# Altium PCB polygon.PcbDoc
Units mm, origin at the board's own origin, x right, y up, seen from the top; angles counter-clockwise.
Board outline 149.16 x 98.2 mm, 2 copper layers (Top Layer, Bottom Layer); 46 components, 102 nets, 353 pads, 142 vias.
Unrouted connection lines stored in the file: 49.
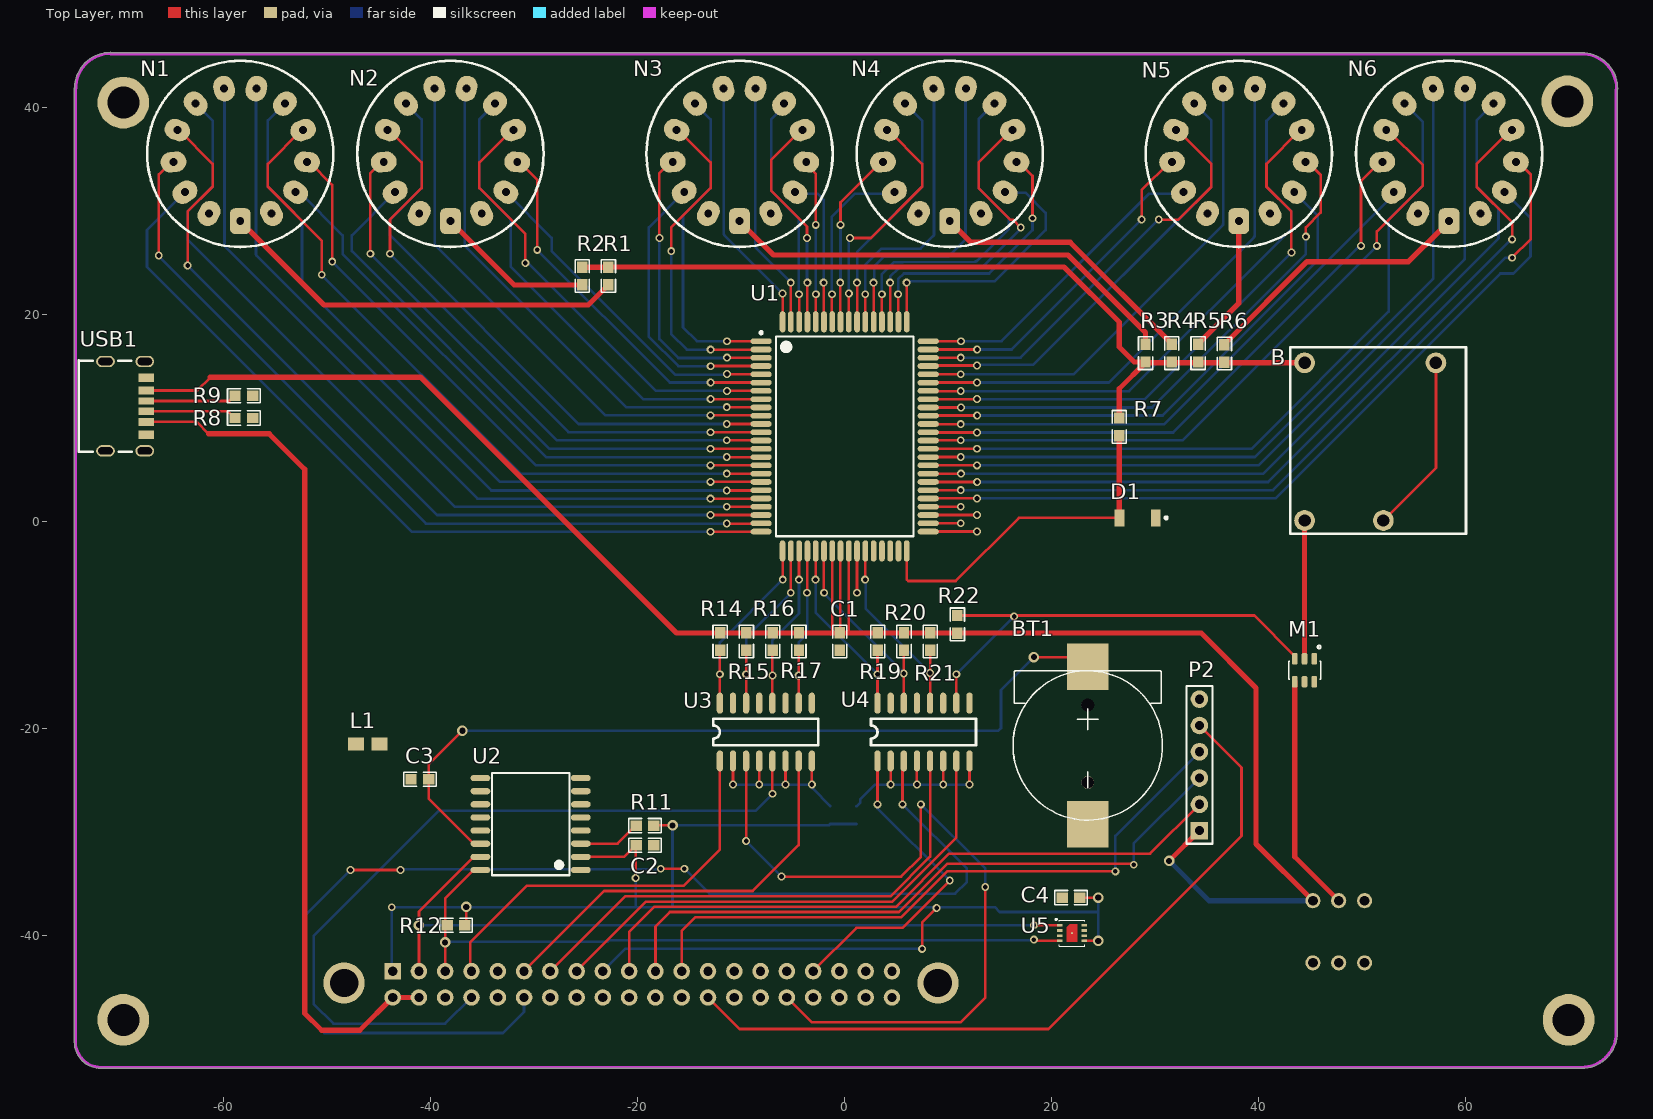
[diagram p0: Top Layer view]
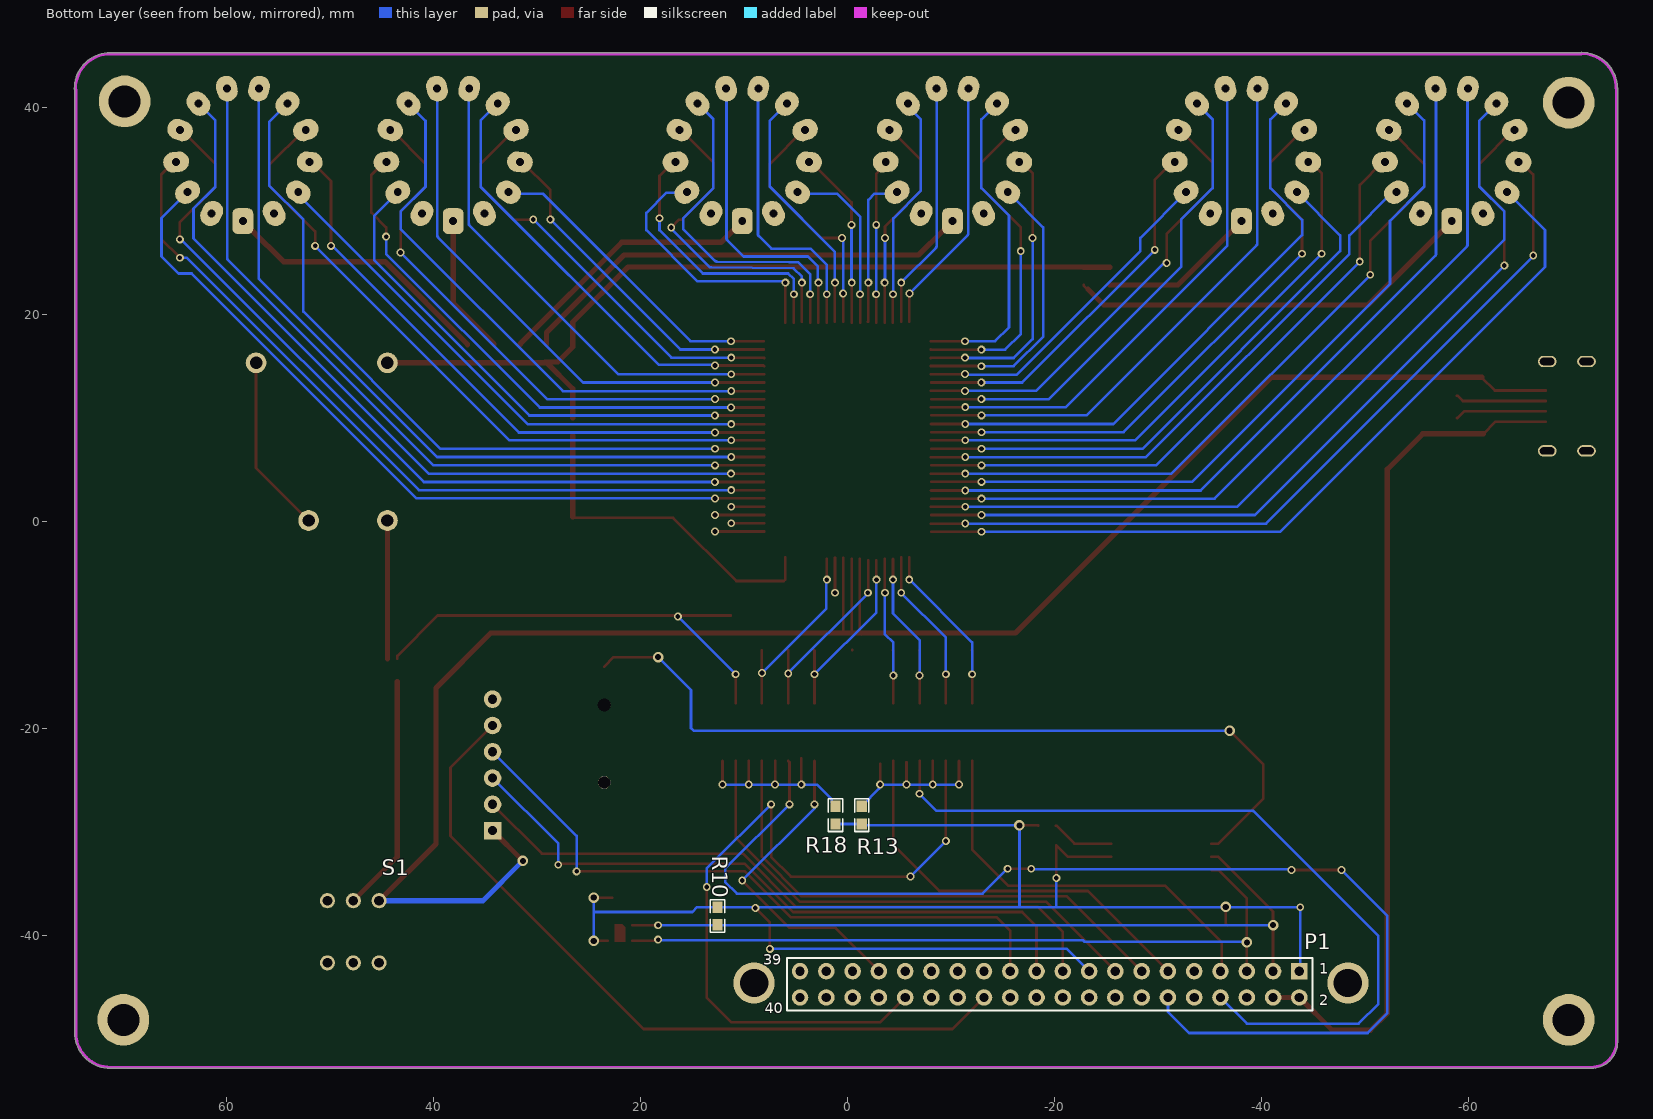
[diagram p1: Bottom Layer view, seen from below]

## Layer stack, top to bottom
Top Solder: solder mask 0.0102, Solder Resist, Dk 3.5
Top Layer: signal copper 0.0356
Dielectric 1: dielectric 0.32, FR-4, Dk 4.8
Bottom Layer: signal copper 0.0356
Bottom Solder: solder mask 0.0102, Solder Resist, Dk 3.5

## Board outline
-74.449,-50.294 ccw(c-71.895,-50.278) -71.908,-52.832 ccw(c-71.907,-52.705) -71.907,-52.832 71.12,-52.832 ccw(c71.12,-52.705) 71.184,-52.815 ccw(c71.248,-52.705) 71.249,-52.832 ccw(c71.222,-49.372) 74.682,-49.372 ccw(c71.222,-49.372) 74.679,-49.219 ccw(c74.551,-49.225) 74.676,-49.2 74.676,41.783 ccw(c74.549,41.783) 74.676,41.795 ccw(c74.58,41.879) 74.707,41.879 ccw(c71.247,41.879) 71.247,45.339 ccw(c71.247,45.212) 71.183,45.322 ccw(c71.12,45.212) 71.12,45.339 -70.911,45.339 ccw(c-70.995,45.243) -70.996,45.37 ccw(c-70.962,41.91) -74.422,41.962 ccw(c-74.322,41.883) -74.449,41.883 -74.449,-50.293 ccw(c-74.322,-50.293)

## Design rules (kind name [scope] priority, off if disabled: settings)
Clearance Clearance_2 [All] p1: gap=0.241 ignorepadtopadclearanceinfootprint=FALSE
Clearance Clearance_1 [All] p2: gap=0.254 ignorepadtopadclearanceinfootprint=FALSE except(0: Arc-Hole Track-Hole SMDPad-Hole THPad-Hole Via-Hole Fill-Hole Poly-Hole Region-Hole Text-Hole)
Clearance [All] p3: gap=0.254 ignorepadtopadclearanceinfootprint=FALSE except(0: Arc-Hole Track-Hole SMDPad-Hole THPad-Hole Via-Hole Fill-Hole Poly-Hole Region-Hole Text-Hole)
PolygonConnect [All] p1: connectstyle=Relief reliefconductorwidth=0.254 reliefentries=4 polygonreliefangle="90 Angle" airgapwidth=0.254
RoutingVias [All] p1: holewidth=0.711 width=1.27 viastyle="Through Hole" minholewidth=0.254 minwidth=0.508 maxholewidth=0.711 maxwidth=1.27
SolderMaskExpansion [All] p1: expansion=0.102 istentingtop=FALSE
Width [All] p1: maxlimit=0.508 minlimit=0.025 preferedwidth=0.254 minimp=50.000000 maximp=50.000000 favimp=50.000000
30 further rules are at their usual default settings.

## Components (designator, comment, footprint, x,y, rotation, side; value= is the part's Value field where it differs from the comment)
B "NCH8200HV" NCH8200HV 44.45,0.127 r90 top
BT1 "CR1220 holder" BAT1220 23.495,-21.59 r180 top
C1 "Cap" C0603 -0.508,-11.557 r90 top value=100pF
C2 "Cap Semi" C0603 -19.304,-31.242 r0 top value=104
C3 "Cap Semi" C0603 -41.06,-24.867 r0 top value=104
C4 "Cap" C0603 21.883,-36.297 r0 top value=100nF
D1 "ZM75" LL-34 28.321,0.381 r180 top
L1 "L0" 0805 -44.958,-21.463 r180 top
M1 "PMOS-AO6401A" SOT95P250X110-6N 44.45,-14.351 r270 top
N1 "ИН-14" IN14 -58.42,35.56 r0 top
N2 "ИН-14" IN14 -38.1,35.56 r0 top
N3 "ИН-14" IN14 -10.16,35.56 r0 top
N4 "ИН-14" IN14 10.16,35.56 r0 top
N5 "ИН-14" IN14 38.1,35.56 r0 top
N6 "ИН-14" IN14 58.42,35.56 r0 top
P1 "Rasp GPIO" HDR2.54-LI-2x20P -19.558,-44.704 r0 bottom
P2 "Header 6" HDR2.54-LI-6P 34.29,-23.495 r90 top
R1 "Res Semi" R0603 -22.86,23.749 r90 top value=20K
R2 "Res Semi" R0603 -25.4,23.749 r90 top value=20K
R3 "Res Semi" R0603 29.108,16.295 r270 top value=20K
R4 "Res Semi" R0603 31.648,16.295 r270 top value=20K
R5 "Res Semi" R0603 34.188,16.295 r270 top value=20K
R6 "Res Semi" R0603 36.728,16.256 r270 top value=20K
R7 "Res Semi" R0603 26.518,9.183 r90 top value=240K
R8 "Res Semi" R0603 -58.078,10.058 r0 top value=5.1K
R9 "Res Semi" R0603 -58.078,12.217 r0 top value=5.1K
R10 "Res Semi" R0603 12.573,-38.1 r90 bottom value=4.7K
R11 "Res Semi" R0603 -19.304,-29.337 r0 top value=10K
R12 "Res Semi" R0603 -37.553,-38.964 r0 top value=4.7K
R13 "Res Semi" R0603 -1.422,-28.36 r270 bottom value=150
R14 "Res Semi" R0603 -12.065,-11.557 r90 top value=1.9K
R15 "Res Semi" R0603 -9.525,-11.557 r90 top value=1.9K
R16 "Res Semi" R0603 -6.985,-11.557 r90 top value=1.9K
R17 "Res Semi" R0603 -4.445,-11.557 r90 top value=1.9K
R18 "Res Semi" R0603 1.118,-28.36 r270 bottom value=150
R19 "Res Semi" R0603 3.175,-11.557 r90 top value=1.9K
R20 "Res Semi" R0603 5.715,-11.557 r90 top value=1.9K
R21 "Res Semi" R0603 8.255,-11.557 r90 top value=1.9K
R22 "Res Semi" R0603 10.922,-9.906 r270 top value=1.9K
S1 "XKB8080-Z" SW_PVA2EEH21.7NV2 47.752,-39.624 r180 bottom
U1 "HV57708" HV57708PG 0,8.255 r0 top
U2 "DS3231" SOP16_75MM -30.353,-29.21 r180 top
U3 "TLP290-4" SO16 -7.62,-20.32 r90 top
U4 "TLP290-4" SO16 7.62,-20.32 r90 top
U5 "SHT31" SHT3x-x-P 21.971,-39.751 r0 top
USB1 "USB3-TypeC-6p" USB-TYPE-C-SMD6 -69.469,11.176 r0 top

## Footprints (in the part's own frame and the unit in brackets; to place one, negate y for a bottom-side part, rotate by r counter-clockwise, add the part's x,y. Pads: shape width x height; smd on the part's side, far side on the other; paste and mask are expansions set on the pad)
0805 [mil] "1/8W"
  rect 60x50 smd: 1(0,0) 2(90,0)
BAT1220 [mm]
  round 1.2 hole 1.2 unplated: 0(0,3.607)
  round 1.2 hole 1.3 unplated: 0(0,-3.886)
  rect 4x4.5 smd: 1(0,-7.595) 2(0,7.645)
  silkscreen extent -7.22,-7.19 7.22,7.24
C0603 [mm] "Chip Resistor; Body 1.6 x 0.8 mm (LxW typ)"
  rect 1.1x1 smd: 1(-0.85,-0.025) 2(0.85,-0.025)
  silkscreen extent -1.57,-0.71 1.57,0.66
HDR2.54-LI-2x20P [mm] "双排排针，20x2脚"
  rect 1.6x1.6 hole 0.9: 1(-24.13,-1.27)
  round 1.6 hole 0.9: 2(-24.13,1.27) 3(-21.59,-1.27) 4(-21.59,1.27) 5(-19.05,-1.27) 6(-19.05,1.27) 7(-16.51,-1.27) 8(-16.51,1.27) 9(-13.97,-1.27) 10(-13.97,1.27) 11(-11.43,-1.27) 12(-11.43,1.27) 13(-8.89,-1.27) 14(-8.89,1.27) 15(-6.35,-1.27) 16(-6.35,1.27) 17(-3.81,-1.27) 18(-3.81,1.27) 19(-1.27,-1.27) 20(-1.27,1.27) 21(1.27,-1.27) 22(1.27,1.27) 23(3.81,-1.27) 24(3.81,1.27) 25(6.35,-1.27) 26(6.35,1.27) 27(8.89,-1.27) 28(8.89,1.27) 29(11.43,-1.27) 30(11.43,1.27) 31(13.97,-1.27) 32(13.97,1.27) 33(16.51,-1.27) 34(16.51,1.27) 35(19.05,-1.27) 36(19.05,1.27) 37(21.59,-1.27) 38(21.59,1.27) 39(24.13,-1.27) 40(24.13,1.27)
  silkscreen extent -25.4,-2.54 25.4,2.54, body extent -25.4,-2.54 25.4,2.54, height 8.5
HDR2.54-LI-6P [mm] "排针，6脚"
  rect 1.7x1.7 hole 0.9: 1(-6.35,0)
  round 1.7 hole 0.9: 2(-3.81,0) 3(-1.27,0) 4(1.27,0) 5(3.81,0) 6(6.35,0)
  silkscreen extent -7.62,-1.27 7.62,1.27, body extent -7.62,-1.27 7.62,1.27, height 2.54
HV57708PG [mm] "QFP, 80-Leads, Body 17.40x23.40mm, Pitch 0.80mm, IPC Medium Density"
  oval 2.05x0.55 smd: 1(-8.075,9.2) 2(-8.075,8.4) 3(-8.075,7.6) 4(-8.075,6.8) 5(-8.075,6) 6(-8.075,5.2) 7(-8.075,4.4) 8(-8.075,3.6) 9(-8.075,2.8) 10(-8.075,2) 11(-8.075,1.2) 12(-8.075,0.4) 13(-8.075,-0.4) 14(-8.075,-1.2) 15(-8.075,-2) 16(-8.075,-2.8) 17(-8.075,-3.6) 18(-8.075,-4.4) 19(-8.075,-5.2) 20(-8.075,-6) 21(-8.075,-6.8) 22(-8.075,-7.6) 23(-8.075,-8.4) 24(-8.075,-9.2) 41(8.075,-9.2) 42(8.075,-8.4) 43(8.075,-7.6) 44(8.075,-6.8) 45(8.075,-6) 46(8.075,-5.2) 47(8.075,-4.4) 48(8.075,-3.6) 49(8.075,-2.8) 50(8.075,-2) 51(8.075,-1.2) 52(8.075,-0.4) 53(8.075,0.4) 54(8.075,1.2) 55(8.075,2) 56(8.075,2.8) 57(8.075,3.6) 58(8.075,4.4) 59(8.075,5.2) 60(8.075,6) 61(8.075,6.8) 62(8.075,7.6) 63(8.075,8.4) 64(8.075,9.2)
  oval 0.55x2.05 smd: 25(-6,-11.075) 26(-5.2,-11.075) 27(-4.4,-11.075) 28(-3.6,-11.075) 29(-2.8,-11.075) 30(-2,-11.075) 31(-1.2,-11.075) 32(-0.4,-11.075) 33(0.4,-11.075) 34(1.2,-11.075) 35(2,-11.075) 36(2.8,-11.075) 37(3.6,-11.075) 38(4.4,-11.075) 39(5.2,-11.075) 40(6,-11.075) 65(6,11.075) 66(5.2,11.075) 67(4.4,11.075) 68(3.6,11.075) 69(2.8,11.075) 70(2,11.075) 71(1.2,11.075) 72(0.4,11.075) 73(-0.4,11.075) 74(-1.2,11.075) 75(-2,11.075) 76(-2.8,11.075) 77(-3.6,11.075) 78(-4.4,11.075) 79(-5.2,11.075) 80(-6,11.075)
  silkscreen extent -8.2,-9.65 6.65,10.15
IN14 [mm]
  rrect50% 2x2.5 hole 0.762: 1(0,-6.5)
  oval 2x2.5 hole 0.762 rot 152.31: 2(-3.021,-5.755)
  oval 2x2.5 hole 0.762 rot 124.62: 3(-5.349,-3.692)
  oval 2x2.5 hole 0.762 rot 96.92: 4(-6.453,-0.784)
  oval 2x2.5 hole 0.762 rot 69.23: 5(-6.078,2.305)
  oval 2x2.5 hole 0.762 rot 41.54: 6(-4.31,4.865)
  oval 2x2.5 hole 0.762 rot 13.85: 7(-1.556,6.311)
  oval 2x2.5 hole 0.762 rot 166.15: 8(1.555,6.311)
  oval 2x2.5 hole 0.762 rot 138.46: 9(4.31,4.866)
  oval 2x2.5 hole 0.762 rot 110.77: 10(6.077,2.305)
  oval 2x2.5 hole 0.762 rot 83.08: 11(6.453,-0.784)
  oval 2x2.5 hole 0.762 rot 55.38: 12(5.349,-3.692)
  oval 2x2.5 hole 0.762 rot 27.69: 13(3.021,-5.755)
  silkscreen extent -9,-9 9,9
LL-34 [mm]
  rect 0.95x1.65 smd: 1(-1.75,0) 2(1.75,0)
  silkscreen extent -2.88,-0.12 -2.63,0.12
NCH8200HV [mm]
  round 2 hole 1.2: 1(0,0) 2(0,-7.62) 3(15.24,-12.7) 4(15.24,0)
  silkscreen extent -1.27,-15.6 16.73,1.4
R0603 [mm] "Chip Resistor; Body 1.6 x 0.8 mm (LxW typ)"
  rect 1.1x1 smd: 1(-0.85,-0.025) 2(0.85,-0.025)
  silkscreen extent -1.57,-0.71 1.57,0.66
SHT3x-x-P [mm] "SHT3x with Plastic"
  rrect50% 0.55x0.25 smd mask+0.05: 1(-1.175,0.75)
  rrect20% 0.55x0.25 smd mask+0.05: 2(-1.175,0.25) 3(-1.175,-0.25) 4(-1.175,-0.75) 5(1.175,-0.75) 6(1.175,-0.25) 7(1.175,0.25) 8(1.175,0.75)
  round 0.2 smd mask+0.05: 9(0,0)
  Top Layer region: 0.5,-0.85 -0.5,-0.85 -0.5,0.55 -0.2,0.85 0.5,0.85
  silkscreen extent -1.55,-1.25 1.25,1.35, body extent -1.25,-1.7 1.25,2.65, height 1.25
SO16 [mil] "封装库来自淘宝卖家 ID：黄晶宝石，其他均为盗版"
  oval 80x24 smd: 1(-110,175) 2(-110,125) 3(-110,75) 4(-110,25) 5(-110,-25) 6(-110,-75) 7(-110,-125) 8(-110,-175) 9(110,-175) 10(110,-125) 11(110,-75) 12(110,-25) 13(110,25) 14(110,75) 15(110,125) 16(110,175)
  silkscreen extent -50,-200 50,200, body extent -118,-197 118,197, height 75
SOP16_75MM [mm]
  oval 1.9x0.6 smd: 1(-4.85,4.445) 2(-4.85,3.175) 3(-4.85,1.905) 4(-4.85,0.635) 5(-4.85,-0.635) 6(-4.85,-1.905) 7(-4.85,-3.175) 8(-4.85,-4.445) 9(4.85,-4.445) 10(4.85,-3.175) 11(4.85,-1.905) 12(4.85,-0.635) 13(4.85,0.635) 14(4.85,1.905) 15(4.85,3.175) 16(4.85,4.445)
  silkscreen extent -3.75,-4.95 3.75,4.95
SOT95P250X110-6N [mm]
  rrect50% 1.11x0.55 smd: 1(-1.11,0.95) 2(-1.11,0) 3(-1.11,-0.95) 4(1.11,-0.95) 5(1.11,0) 6(1.11,0.95)
  silkscreen extent -2.39,-1.55 0.85,1.55
SW_PVA2EEH21.7NV2 [mm]
  round 1.458 hole 0.95: 1(2.5,-3) 2(0,-3) 3(-2.5,-3) 4(2.5,3) 5(0,3) 6(-2.5,3)
USB-TYPE-C-SMD6 [mm]
  oval 1.8x1.1 hole 0.7 slot 1.401 at 0 deg: 0(-1.975,-4.32) 0(-1.975,4.32) 0(1.825,-4.32) 0(1.825,4.32)
  rect 1.5x0.8 smd: 1(1.975,2.75) 6(1.975,-2.75)
  rect 1.5x0.76 smd: 2(1.975,1.52) 5(1.975,-1.52)
  rect 1.5x0.7 smd: 3(1.975,0.5) 4(1.975,-0.5)
  silkscreen extent -4.58,-4.41 0.56,4.41

## Part data
BT1: library part BATTERY
C1 C4: "Capacitor", LatestRevisionDate=17-Jul-2002, LatestRevisionNote="Re-released for DXP Platform.", PackageDescription="Radial Cap, Thru-Hole; 2 Leads; 0.3 in Pin Spacing", PackageReference=RAD-0.3, Published=8-Jun-2000, Publisher="Altium Limited"
C2 C3: "Capacitor (Semiconductor SIM Model)", LatestRevisionDate=17-Jul-2002, LatestRevisionNote="Re-released for DXP Platform.", PackageReference=C1206, Published=8-Jun-2000, Publisher="Altium Limited"
D1: library part "Diode 11DQ03", "Schottky Rectifier", Code_JEDEC=DO-204-AL, ComponentLink1Description="Manufacturer Link", ComponentLink1URL=http://www.irf.com/, ComponentLink2Description=Datasheet, ComponentLink2URL=http://www.irf.com/product-info/datasheets/data/11dq03.pdf, DatasheetVersion=Dec-1997, LatestRevisionDate=17-Jul-2002, LatestRevisionNote="Re-released for DXP Platform.", PackageDescription="Diode, Axial; Body 5.2 x 2.7 mm (LxDia. max), Lead Dia. 0.86 mm (max)", PackageReference=DO-204AL, Published=8-Jun-2000, Publisher="Altium Limited"
M1: library part AO6401A
P1: library part "Header 20X2", "Header, 20-Pin, Dual row", LatestRevisionDate=17-Jul-2002, LatestRevisionNote="Re-released for DXP Platform.", Publisher="Altium Limited"
P2: "Header, 6-Pin", LatestRevisionDate=17-Jul-2002, LatestRevisionNote="Re-released for DXP Platform.", Publisher="Altium Limited"
R1 R2 R3 R4 R5 R6 R7 R8 R9 R10 R11 R12 R13 R14 R15 R16 R17 R18 R19 R20 R21 R22: "Semiconductor Resistor", LatestRevisionDate=17-Jul-2002, LatestRevisionNote="Re-released for DXP Platform.", PackageReference=AXIAL-0.5, Published=8-Jun-2000, Publisher="Altium Limited"

## Free pads (board coordinates)
  round 5 hole 3.1: 12(-69.723,40.513) 13(-69.723,-48.133) 14(69.977,-48.133) 15(69.85,40.64)
  round 4 hole 2.75: 16(-48.387,-44.577) 17(9.017,-44.577)

## Via types
v1: diameter 0.762, hole 0.457, Top Layer to Bottom Layer, tented both sides, 133 vias
v2: diameter 1.016, hole 0.584, Top Layer to Bottom Layer, tented both sides, 9 vias

## Nets (pads, with @x,y where several pads share a name; then routed paths per layer and width w, separated by ;. In a path a pad name is that pad's centre, name@x,y a point inside that pad or via, vN(x,y) a via of type N, cw(c..) or ccw(c..) an arc to the next point about the centre after c; other vN are vias at no path point)
\I\N\T\/SQW: R11.1 U2.3 | length 6.1
  Top Layer w0.254: U2.3 -21.957,-31.115 -20.204,-29.362 R11.1
Boost_switch: M1.3 R22.1 U4.10 | length 44.8
  Top Layer w0.254: U4.10 v1(10.795,-14.732) ; R22.1@11.278,-9.056 39.595,-9.056 43.5,-12.961 M1.3
  Bottom Layer w0.254: v1(10.795,-14.732) v1(16.383,-9.144)
DGND: BT1.2 C2.2 C3.1 C4.1 L1.1 P1.6 P1.9 P1.14 P1.20 P1.25 P1.30 P1.34 P1.39 P2.6 U2.5 U2.6 U2.7 U2.8 U2.9 U2.10 U2.11 U2.12 U2.13 U5.2 U5.7 U5.8 U5.9
GND: B.2 B.3 C1.1 D1.1 L1.2 pad.13 pad.14 R8.2 R9.2 U1.34 U3.9 U3.11 U3.13 U3.15 U4.9 U4.11 U4.13 U4.15 USB1.0 USB1.1 USB1.6 | length 20.8
  Top Layer w0.254: C1.1 C1.1@-0.483,-12.357 ; v1(1.194,-6.858) U1.34@1.194,-3.462 ; B.2 57.15,5.207 B.3
HV_CLK: R20.1 U1.30 U4.14 | length 19.4
  Top Layer w0.254: U1.30@-2.032,-3.716 -2.032,-6.807 v1(-1.981,-6.858) ; U4.14 v1(5.715,-14.656) 5.715,-12.432 R20.1
  Bottom Layer w0.254: v1(-1.981,-6.858) -2.032,-6.909 -1.981,-6.909 5.715,-14.605 v1(5.715,-14.656)
HV_DIN1: R14.1 U1.25 U3.16 | length 18.9
  Top Layer w0.254: U3.16 v1(-12.065,-14.732) -12.065,-12.432 R14.1 ; U1.25@-6,-3.455 -5.984,-3.471 v1@-5.984,-5.573
  Bottom Layer w0.254: v1(-12.065,-14.732) -12.065,-11.669 v1(-5.984,-5.588)
HV_DIN2: R15.1 U1.26 U3.14 | length 18.2
  Top Layer w0.254: U3.14 v1(-9.525,-14.732) -9.525,-12.432 R15.1 ; v1(-5.207,-6.858) -5.207,-3.462 U1.26@-5.2,-3.455
  Bottom Layer w0.254: v1(-9.525,-14.732) -9.525,-11.176 v1(-5.207,-6.858)
HV_DIN3: R16.1 U1.27 U3.12 | length 17.6
  Top Layer w0.254: U3.12 v1(-6.985,-14.859) -6.985,-12.432 R16.1 ; v1@-4.41,-5.7 v1(-4.41,-5.588) U1.27@-4.41,-3.598
  Bottom Layer w0.254: v1(-6.985,-14.859) -6.985,-11.43 -4.41,-8.855 v1(-4.41,-5.588)
HV_DIN4: R17.1 U1.28 U3.10 | length 16.9
  Top Layer w0.254: U3.10 v1(-4.445,-14.859) -4.445,-12.432 R17.1 ; v1@-3.632,-6.985 v1(-3.632,-6.858) U1.28@-3.632,-3.589
  Bottom Layer w0.254: v1(-4.445,-14.859) -4.445,-11.684 -3.632,-10.871 v1(-3.632,-6.858)
HV_LE: R19.1 U1.29 U4.16 | length 18.9
  Top Layer w0.254: v1@-2.809,-5.827 v1(-2.809,-5.588) U1.29@-2.809,-3.725 ; U4.16 v1(3.175,-14.732) 3.175,-12.432 R19.1
  Bottom Layer w0.254: v1(-2.809,-5.588) -2.809,-8.748 v1(3.175,-14.732)
HV_POL: R21.1 U1.35 U4.12 | length 18.8
  Top Layer w0.254: v1@1.981,-5.7 v1(1.981,-5.588) U1.35@1.981,-3.598 ; U4.12 v1(8.255,-14.605) 8.255,-12.432 R21.1
  Bottom Layer w0.254: v1(1.981,-5.588) 2.032,-5.639 2.032,-8.382 v1(8.255,-14.605)
I2C_SCL: P1.5 R12.1 U2.16 U5.4 | length 71.1
  Top Layer w0.254: P1.5 v2(-38.608,-40.64) -38.608,-37.973 -38.608,-36.41 -35.853,-33.655 U2.16 ; v1(18.288,-40.386) 18.425,-40.386 18.54,-40.501 U5.4
  Bottom Layer w0.254: v2(-38.608,-40.64) -38.544,-40.576 -22.924,-40.576 -22.86,-40.513 -22.796,-40.45 18.224,-40.45 v1(18.288,-40.386)
I2C_SDA: P1.3 R10.1 U2.15 U5.1 | length 75.8
  Top Layer w0.254: P1.3 v2(-41.148,-38.989) -41.148,-37.68 -35.853,-32.385 U2.15 ; v1(18.288,-38.989) 18.298,-38.999 20.794,-38.999 U5.1
  Bottom Layer w0.254: v2(-41.148,-38.989) -22.86,-38.989 v1(18.288,-38.989)
N1_0: N1.12 U1.15 | length 56.8
  Top Layer w0.254: N1.12@-53.213,32.01 N1.12 ; v1(-11.392,6.254) U1.15@-8.093,6.254
  Bottom Layer w0.254: N1.12 -52.696,31.868 -48.514,27.686 -48.514,25.908 -28.86,6.254 v1(-11.392,6.254)
N1_1: N1.3 U1.24 | length 78.7
  Top Layer w0.254: v1(-12.972,-0.965) U1.24@-8.11,-0.965
  Bottom Layer w0.254: N1.3 -67.437,28.2 -67.437,24.638 -41.834,-0.965 v1(-12.972,-0.965)
N1_2: N1.4 U1.23 | length 78.7
  Top Layer w0.254: v1(-66.294,25.733) -66.294,33.573 -65.091,34.776 N1.4 ; v1(-11.392,-0.173) U1.23@-8.093,-0.173
  Bottom Layer w0.254: v1(-66.294,25.733) -66.294,25.654 -40.467,-0.173 v1(-11.392,-0.173)
N1_3: N1.5 U1.22 | length 81
  Top Layer w0.254: N1.5 -64.353,37.865 -61.087,34.599 -61.087,32.385 -63.5,29.972 v1(-63.5,24.765) ; v1(-12.972,0.66) U1.22@-8.11,0.66
  Bottom Layer w0.254: v1(-63.5,24.765) -39.395,0.66 v1(-12.972,0.66)
N1_4: N1.6 U1.21 | length 80.9
  Top Layer w0.254: v1(-11.392,1.453) U1.21@-8.093,1.453
  Bottom Layer w0.254: N1.6 -61.087,38.782 -61.087,32.385 -63.5,29.972 -63.5,27.305 -37.648,1.453 v1(-11.392,1.453)
N1_5: N1.7 U1.20 | length 77.2
  Top Layer w0.254: v1(-12.972,2.235) U1.20@-8.11,2.235
  Bottom Layer w0.254: N1.7@-59.975,41.87 -59.97,41.86 cw(c-60.198,41.748) -59.944,41.748 -59.944,30.067 ccw(c-59.69,30.067) -59.944,30.06 cw(c-61.324,30.026) -59.944,29.991 ccw(c-59.69,29.985) -59.944,29.985 -59.944,26.775 ccw(c-59.69,26.775) -59.87,26.596 -35.509,2.235 v1(-12.972,2.235)
N1_6: N1.8 U1.19 | length 74.3
  Top Layer w0.254: v1(-11.392,3.028) U1.19@-8.093,3.028
  Bottom Layer w0.254: N1.8 -56.87,41.862 ccw(c-56.642,41.749) -56.896,41.749 -56.896,30.068 cw(c-57.15,30.067) -56.896,30.06 ccw(c-55.516,30.026) -56.896,29.991 cw(c-57.15,29.985) -56.896,29.984 -56.896,25.886 ccw(c-56.642,25.886) -56.822,25.707 -34.143,3.028 v1(-11.392,3.028)
N1_7: N1.9 U1.18 | length 71.7
  Top Layer w0.254: v1(-12.972,3.861) U1.18@-8.11,3.861
  Bottom Layer w0.254: N1.9 -55.753,38.782 -55.753,32.385 -52.451,29.083 -52.451,22.987 -33.325,3.861 v1(-12.972,3.861)
N1_8: N1.10 U1.17 | length 68.1
  Top Layer w0.254: N1.10 -52.488,37.865 -55.753,34.6 -55.753,32.385 -50.546,27.178 v1(-50.546,23.876) ; v1(-11.392,4.653) U1.17@-8.093,4.653
  Bottom Layer w0.254: v1(-50.546,23.876) -31.323,4.653 v1(-11.392,4.653)
N1_9: N1.11 U1.16 | length 60.3
  Top Layer w0.254: N1.11 -51.749,34.776 -49.53,32.557 v1(-49.53,25.146) ; v1(-12.972,5.461) U1.16@-8.11,5.461
  Bottom Layer w0.254: v1(-49.53,25.146) -29.845,5.461 v1(-12.972,5.461)
N2_0: N2.12 U1.5 | length 32.8
  Top Layer w0.254: v1(-11.374,14.28) U1.5@-8.075,14.28
  Bottom Layer w0.254: N2.12 -28.321,27.438 -28.321,26.162 -16.383,14.224 -11.43,14.224 v1(-11.374,14.28)
N2_1: N2.3 U1.14 | length 54.9
  Top Layer w0.254: v1(-12.972,7.061) U1.14@-8.11,7.061
  Bottom Layer w0.254: N2.3 -47.625,27.692 -47.625,26.162 -28.524,7.061 v1(-12.972,7.061)
N2_2: N2.4 U1.13 | length 55
  Top Layer w0.254: v1(-45.847,25.908) -45.847,33.7 -45.107,34.44 -45.107,34.776 N2.4 ; v1(-11.392,7.879) U1.13@-8.093,7.879
  Bottom Layer w0.254: v1(-45.847,25.908) -27.818,7.879 v1(-11.392,7.879)
N2_3: N2.5 U1.12 | length 57.5
  Top Layer w0.254: N2.5 -44.033,37.865 -40.894,34.726 -40.894,32.258 -43.942,29.21 v1@-43.942,26.035 ; v1(-12.972,8.661) U1.12@-8.11,8.661
  Bottom Layer w0.254: v1(-43.942,25.908) -26.695,8.661 v1(-12.972,8.661)
N2_4: N2.6 U1.11 | length 58
  Top Layer w0.254: v1(-11.392,9.454) U1.11@-8.093,9.454
  Bottom Layer w0.254: N2.6 -42.41,40.404 -40.894,38.887 -40.894,32.258 -43.964,29.188 -43.964,27.708 -25.71,9.454 v1(-11.392,9.454)
N2_5: N2.7 U1.10 | length 53.4
  Top Layer w0.254: v1(-12.972,10.287) U1.10@-8.11,10.287
  Bottom Layer w0.254: N2.7@-39.655,41.87 -39.65,41.86 cw(c-39.878,41.748) -39.624,41.748 -39.624,30.067 ccw(c-39.37,30.067) -39.624,30.06 cw(c-41.004,30.026) -39.624,29.991 ccw(c-39.37,29.985) -39.624,29.985 -39.624,26.902 ccw(c-39.37,26.902) -39.55,26.723 -23.114,10.287 v1(-12.972,10.287)
N2_6: N2.8 U1.9 | length 50.3
  Top Layer w0.254: v1(-11.392,11.08) U1.9@-8.093,11.08
  Bottom Layer w0.254: N2.8 -36.703,41.713 -36.703,26.67 -21.113,11.08 v1(-11.392,11.08)
N2_7: N2.9 U1.8 | length 47.1
  Top Layer w0.254: v1(-12.954,11.862) U1.8@-8.093,11.862
  Bottom Layer w0.254: N2.9 -35.306,38.909 -35.306,32.258 -32.258,29.21 -32.258,24.638 -19.482,11.862 v1(-12.954,11.862)
N2_8: N2.10 U1.7 | length 44
  Top Layer w0.254: N2.10 -32.168,37.865 -35.306,34.727 -35.306,32.258 -30.861,27.813 v1(-30.861,25.019) ; v1(-11.374,12.654) U1.7
  Bottom Layer w0.254: v1(-30.861,25.019) -30.607,25.019 -18.242,12.654 v1(-11.374,12.654)
N2_9: N2.11 U1.6 | length 36.4
  Top Layer w0.254: N2.11 -31.429,34.776 -29.718,33.065 v1(-29.718,26.289) ; v1(-12.954,13.462) U1.6@-8.093,13.462
  Bottom Layer w0.254: v1(-29.718,26.289) -16.891,13.462 v1(-12.954,13.462)
N3_0: N3.12 U1.75 | length 14.9
  Top Layer w0.254: v1(-2.032,23.114) -2.032,19.362 U1.75
  Bottom Layer w0.254: N3.12 -4.669,31.726 -2.643,31.726 -2.032,31.115 v1(-2.032,23.114)
N3_1: N3.3 U1.4 | length 27.4
  Top Layer w0.254: v1(-12.954,15.037) -12.936,15.055 U1.4
  Bottom Layer w0.254: N3.3 -18.923,28.454 -18.923,17.883 -16.077,15.037 v1(-12.954,15.037)
N3_2: N3.4 U1.3 | length 28.4
  Top Layer w0.254: v1(-17.907,27.432) -17.907,33.7 -16.831,34.776 N3.4 ; v1(-11.374,15.87) -11.367,15.862 -8.108,15.862 U1.3@-8.075,15.829
  Bottom Layer w0.254: v1(-17.907,27.432) -17.907,17.653 -16.083,15.829 -11.415,15.829 v1(-11.374,15.87)
N3_3: N3.5 U1.2 | length 32.1
  Top Layer w0.254: v1(-16.764,26.162) -16.764,28.448 -12.954,32.258 -12.954,34.726 -16.093,37.865 N3.5 ; v1(-12.954,16.637) -8.093,16.637 U1.2
  Bottom Layer w0.254: v1(-16.764,26.162) -16.764,18.161 -15.24,16.637 v1(-12.954,16.637)
N3_4: N3.6 U1.1 | length 31.5
  Top Layer w0.254: v1(-11.374,17.455) U1.1
  Bottom Layer w0.254: N3.6 -12.954,38.909 -12.954,32.258 -15.621,29.591 -15.621,18.796 -14.28,17.455 v1(-11.374,17.455)
N3_5: N3.7 U1.80 | length 24.9
  Top Layer w0.254: U1.80 v1(-6,22.067)
  Bottom Layer w0.254: N3.7@-11.715,41.87 -11.71,41.86 cw(c-11.938,41.748) -11.684,41.748 -11.684,30.067 ccw(c-11.43,30.067) -11.684,30.06 cw(c-13.064,30.026) -11.684,29.991 ccw(c-11.43,29.985) -11.684,29.985 -11.684,27.856 ccw(c-11.43,27.856) -11.61,27.677 v1(-6,22.067)
N3_6: N3.8 U1.79 | length 24
  Top Layer w0.254: v1(-5.207,23.114) -5.203,23.11 -5.203,19.333 U1.79
  Bottom Layer w0.254: N3.8 -8.61,41.862 ccw(c-8.382,41.749) -8.636,41.749 -8.636,30.068 cw(c-8.89,30.067) -8.636,30.06 ccw(c-7.256,30.026) -8.636,29.991 cw(c-8.89,29.985) -8.636,29.984 -8.636,26.655 ccw(c-8.382,26.655) -8.562,26.476 -5.204,23.118 v1(-5.207,23.114)
N3_7: N3.9 U1.78 | length 22.8
  Top Layer w0.254: U1.78@-4.407,19.257 v1(-4.407,21.994)
  Bottom Layer w0.254: N3.9 -5.85,40.124 -7.112,38.862 -7.112,32.004 -4.445,29.337 -4.445,22.032 v1(-4.407,21.994)
N3_8: N3.10 U1.77 | length 21.4
  Top Layer w0.254: N3.10 -4.228,37.865 -7.112,34.981 -7.112,32.004 -3.645,28.537 v1(-3.645,27.432) ; U1.77@-3.607,19.257 v1(-3.607,23.114) v1@-3.607,23.161
  Bottom Layer w0.254: v1(-3.645,27.432) -3.645,23.152 v1(-3.607,23.114)
N3_9: N3.11 U1.76 | length 15.9
  Top Layer w0.254: N3.11 -3.707,34.522 -2.794,33.609 v1(-2.794,28.702) ; v1(-2.789,21.994) -2.794,21.988 -2.794,19.27 U1.76@-2.781,19.257
  Bottom Layer w0.254: v1(-2.794,28.702) -2.794,21.999 v1(-2.789,21.994)
N4_0: N4.12 U1.65 | length 25.8
  Top Layer w0.254: U1.65@5.994,19.257 5.997,19.26 5.997,23.137 v1@5.994,23.139
  Bottom Layer w0.254: v1@5.994,23.139 6.092,23.237 6.393,23.237 6.397,23.241 14.478,23.241 19.431,28.194 19.431,29.845 17.455,31.821 15.556,31.821 N4.12
  other v1: 5.994,23.114
N4_1: N4.3 U1.74 | length 17.3
  Top Layer w0.254: U1.74@-1.232,19.257 v1(-1.232,21.994)
  Bottom Layer w0.254: v1(-1.232,21.994) -1.232,29.502 0.992,31.726 4.669,31.726 N4.3
N4_2: N4.4 U1.73 | length 17.4
  Top Layer w0.254: U1.73@-0.432,19.257 v1@-0.432,23.161 ; v1@-0.406,28.931 -0.406,30.881 3.489,34.776 N4.4
  Bottom Layer w0.254: v1@-0.432,23.161 -0.406,23.186 v1@-0.406,28.931
  other v1: -0.432,23.114 -0.406,28.702
N4_3: N4.5 U1.72 | length 24.2
  Top Layer w0.254: U1.72@0.401,19.33 v1(0.401,22.067) ; v1(0.508,27.432) 2.54,27.432 7.493,32.385 7.493,34.599 4.227,37.865 N4.5
  Bottom Layer w0.254: v1(0.401,22.067) 0.401,27.187 0.508,27.295 v1(0.508,27.432)
N4_4: N4.6 U1.71 | length 24.4
  Top Layer w0.254: U1.71@1.201,19.33 v1@1.201,23.234
  Bottom Layer w0.254: v1@1.201,23.234 1.201,26.093 7.493,32.385 7.493,38.782 N4.6
  other v1: 1.201,23.114
N4_5: N4.7 U1.70 | length 27.6
  Top Layer w0.254: U1.70@1.994,19.257 v1(1.994,21.994)
  Bottom Layer w0.254: v1(1.994,21.994) 1.994,24.854 3.54,26.4 7.35,26.4 8.562,27.612 ccw(c8.382,27.791) 8.636,27.792 8.636,29.985 cw(c8.89,29.985) 8.636,29.991 ccw(c7.256,30.026) 8.636,30.06 cw(c8.89,30.067) 8.636,30.067 8.636,41.748 ccw(c8.382,41.748) 8.61,41.86 N4.7@8.605,41.87
N4_6: N4.8 U1.69 | length 29.9
  Top Layer w0.254: U1.69@2.794,19.257 v1@2.794,23.161
  Bottom Layer w0.254: v1@2.794,23.161 2.865,23.232 2.865,24.709 3.799,25.643 10.022,25.643 11.61,27.231 ccw(c11.43,27.41) 11.684,27.41 11.684,29.984 ccw(c11.43,29.985) 11.684,29.991 cw(c13.064,30.026) 11.684,30.06 ccw(c11.43,30.067) 11.684,30.068 11.684,41.749 cw(c11.938,41.749) 11.71,41.862 N4.8
  other v1: 2.794,23.114
N4_7: N4.9 U1.68 | length 32.7
  Top Layer w0.254: U1.68@3.594,19.257 v1(3.594,21.994)
  Bottom Layer w0.254: v1(3.594,21.994) 3.594,23.93 4.763,25.098 5.595,25.098 12.598,25.147 ccw(c12.596,25.401) 12.774,25.22 ; 12.774,25.22 15.875,28.321 15.875,29.337 12.954,32.258 12.954,38.909 N4.9
N4_8: N4.10 U1.67 | length 31.7
  Top Layer w0.254: v1(4.394,23.114) 4.397,23.111 4.397,19.333 U1.67 ; N4.10 16.092,37.865 12.954,34.727 12.954,32.258 16.002,29.21 16.256,29.21 v1(17.018,28.448)
  Bottom Layer w0.254: v1(4.394,23.114) 4.394,23.698 5.196,24.5 13.182,24.587 ccw(c13.179,24.841) 13.359,24.662 17.018,28.321 v1(17.018,28.448)
N4_9: N4.11 U1.66 | length 26.5
  Top Layer w0.254: U1.66@5.169,19.257 v1(5.169,21.994) ; N4.11 16.831,34.776 18.161,33.446 v1(18.161,29.337)
  Bottom Layer w0.254: v1(5.169,21.994) 5.169,23.457 5.715,24.003 13.97,24.003 18.161,28.194 v1(18.161,29.337)
N5_0: N5.12 U1.55 | length 51.4
  Top Layer w0.254: U1.55@8.075,10.28 v1(12.809,10.28)
  Bottom Layer w0.254: v1(12.809,10.28) 30.727,10.28 45.72,25.273 45.72,29.597 N5.12
N5_1: N5.3 U1.64 | length 30.6
  Top Layer w0.254: U1.64 v1(11.247,17.455)
  Bottom Layer w0.254: v1(11.247,17.455) 15.169,17.455 29.44,31.726 32.609,31.726 N5.3
N5_2: N5.4 U1.63 | length 33
  Top Layer w0.254: U1.63 v1(12.809,16.655) ; v1(28.702,29.21) 28.702,32.049 31.429,34.776 N5.4
  Bottom Layer w0.254: v1(12.809,16.655) 16.147,16.655 v1(28.702,29.21) v1@28.448,29.21
N5_3: N5.5 U1.62 | length 41.2
  Top Layer w0.254: U1.62@8.047,15.837 8.073,15.862 11.212,15.862 v1(11.219,15.87) ; v1(30.353,29.21) 32.258,29.21 35.433,32.385 35.433,34.599 32.167,37.865 N5.5
  Bottom Layer w0.254: v1(11.219,15.87) 11.224,15.875 17.018,15.875 v1(30.353,29.21)
N5_4: N5.6 U1.61 | length 43.3
  Top Layer w0.254: U1.61@8.047,15.037 8.122,15.112 9.091,15.112 9.092,15.113 12.776,15.113 v1(12.781,15.118)
  Bottom Layer w0.254: v1(12.781,15.118) 12.827,15.164 18.212,15.164 35.433,32.385 35.433,38.782 N5.6
N5_5: N5.7 U1.60 | length 47.7
  Top Layer w0.254: U1.60@8.047,14.262 v1(11.219,14.262)
  Bottom Layer w0.254: v1(11.219,14.262) 22.136,14.262 36.502,28.628 ccw(c36.322,28.807) 36.576,28.808 36.576,29.985 cw(c36.83,29.985) 36.576,29.991 ccw(c35.196,30.026) 36.576,30.06 cw(c36.83,30.067) 36.576,30.067 36.576,41.748 ccw(c36.322,41.748) 36.55,41.86 N5.7@36.545,41.87
N5_6: N5.8 U1.59 | length 51.7
  Top Layer w0.254: U1.59@8.047,13.462 v1(12.781,13.462)
  Bottom Layer w0.254: v1(12.781,13.462) 25.527,13.462 39.55,27.485 ccw(c39.37,27.664) 39.624,27.664 39.624,29.984 ccw(c39.37,29.985) 39.624,29.991 cw(c41.004,30.026) 39.624,30.06 ccw(c39.37,30.067) 39.624,30.068 39.624,41.749 cw(c39.878,41.749) 39.65,41.862 N5.8
N5_7: N5.9 U1.58 | length 55.4
  Top Layer w0.254: U1.58@8.047,12.636 v1(11.219,12.636)
  Bottom Layer w0.254: v1(11.219,12.636) 27.495,12.636 43.18,28.321 43.18,29.972 40.767,32.385 40.767,38.761 42.41,40.404 N5.9
N5_8: N5.10 U1.57 | length 55.3
  Top Layer w0.254: U1.57@8.047,11.862 v1(12.781,11.862) ; v1(43.18,26.035) 43.18,29.972 40.767,32.385 40.767,34.6 44.032,37.865 N5.10
  Bottom Layer w0.254: v1(12.781,11.862) 29.007,11.862 v1(43.18,26.035)
N5_9: N5.11 U1.56 | length 52.8
  Top Layer w0.254: U1.56 v1(11.247,11.054) ; N5.11 44.771,34.776 46.002,33.545 46.002,29.873 44.577,28.448 v1(44.577,27.559)
  Bottom Layer w0.254: v1(11.247,11.054) 29.723,11.054 44.577,25.908 v1(44.577,27.559)
N6_0: N6.12 U1.45 | length 75.2
  Top Layer w0.254: U1.45@8.047,2.261 v1(12.781,2.261)
  Bottom Layer w0.254: v1(12.781,2.261) 41.631,2.261 63.373,24.003 64.643,24.003 66.294,25.654 66.294,29.343 N6.12
N6_1: N6.3 U1.54 | length 54.5
  Top Layer w0.254: U1.54@8.047,9.436 v1(11.219,9.436)
  Bottom Layer w0.254: v1(11.219,9.436) 30.899,9.436 53.071,31.608 N6.3
N6_2: N6.4 U1.53 | length 58.4
  Top Layer w0.254: U1.53 8.094,8.636 v1(12.781,8.636) ; v1(49.911,26.67) 49.911,32.938 51.749,34.776 N6.4
  Bottom Layer w0.254: v1(12.781,8.636) 31.75,8.636 49.784,26.67 v1(49.911,26.67)
N6_3: N6.5 U1.52 | length 65.8
  Top Layer w0.254: U1.52@8.047,7.887 8.067,7.867 11.207,7.867 v1(11.219,7.879) ; v1(51.435,26.67) 51.435,28.067 55.88,32.512 55.88,34.472 52.487,37.865 N6.5
  Bottom Layer w0.254: v1(11.219,7.879) 11.224,7.874 32.639,7.874 v1(51.435,26.67)
N6_4: N6.6 U1.51 | length 72.2
  Top Layer w0.254: U1.51@8.047,7.061 v1(12.781,7.061)
  Bottom Layer w0.254: v1(12.781,7.061) 39.319,7.061 52.578,20.32 52.578,29.21 55.88,32.512 55.88,38.655 N6.6
N6_5: N6.7 U1.50 | length 74.4
  Top Layer w0.254: U1.50@8.047,6.261 v1(11.219,6.261)
  Bottom Layer w0.254: v1(11.219,6.261) 39.662,6.261 56.822,23.421 ccw(c56.642,23.6) 56.896,23.601 56.896,29.985 cw(c57.15,29.985) 56.896,29.991 ccw(c55.516,30.026) 56.896,30.06 cw(c57.15,30.067) 56.896,30.067 56.896,41.748 ccw(c56.642,41.748) 56.87,41.86 N6.7@56.865,41.87
N6_6: N6.8 U1.49 | length 76.6
  Top Layer w0.254: U1.49@8.047,5.461 v1(12.781,5.461)
  Bottom Layer w0.254: v1(12.781,5.461) 40.005,5.461 59.87,25.326 ccw(c59.69,25.505) 59.944,25.505 59.944,29.984 ccw(c59.69,29.985) 59.944,29.991 cw(c61.324,30.026) 59.944,30.06 ccw(c59.69,30.067) 59.944,30.068 59.944,41.749 cw(c60.198,41.749) 59.97,41.862 N6.8
N6_7: N6.9 U1.48 | length 79.1
  Top Layer w0.254: U1.48@8.075,4.653 v1(11.247,4.653)
  Bottom Layer w0.254: v1(11.247,4.653) 40.467,4.653 63.195,27.381 63.195,30.277 61.087,32.385 61.087,38.782 N6.9
N6_8: N6.10 U1.47 | length 79.6
  Top Layer w0.254: U1.47@8.075,3.853 v1(12.809,3.853) ; N6.10 64.352,37.865 61.087,34.6 61.087,32.385 64.516,28.956 v1(64.516,27.305)
  Bottom Layer w0.254: v1(12.809,3.853) 40.937,3.853 64.389,27.305 v1(64.516,27.305)
N6_9: N6.11 U1.46 | length 77.3
  Top Layer w0.254: U1.46@8.047,3.061 v1(11.219,3.061) ; v1(64.516,25.527) 66.322,27.333 66.322,33.545 65.091,34.776 N6.11 N6.11@65.405,34.244
  Bottom Layer w0.254: v1(11.219,3.061) 41.415,3.061 63.881,25.527 v1(64.516,25.527)
NetB_1: B.1 M1.2 | length 13.4
  Top Layer w0.508: M1.2 B.1
NetBT1_1: BT1.1 C3.2 U2.14 | length 80.7
  Top Layer w0.254: v2(-36.957,-20.193) -40.21,-23.446 C3.2 -40.21,-26.758 -35.853,-31.115 U2.14 ; v2(18.288,-13.081) 22.581,-13.081 BT1.1
  Bottom Layer w0.254: v2(-36.957,-20.193) 14.859,-20.193 15.113,-19.939 15.113,-16.256 v2(18.288,-13.081)
NetD1_2: D1.2 R7.1 U1.40 | length 33.3
  Top Layer w0.254: U1.40@6,-3.455 6,-5.566 6.149,-5.715 10.734,-5.715 16.83,0.381 D1.2@26.444,0.381 ; D1.2@26.543,0.48 D1.2@26.444,0.381 ; D1.2 D1.2@26.444,0.381
  Top Layer w0.508: D1.2@26.543,0.48 R7.1
NetM1_4: M1.4 S1.5 | length 22.9
  Top Layer w0.508: M1.4 43.5,-32.372 S1.5
NetN1_1: N1.1 R1.1 | length 39.8
  Top Layer w0.254: N1.1 -58.42,29.012 -57.575,28.167 N1.1@-57.527,28.167 ; R1.1@-23.258,22.476 -23.208,22.476 -22.835,22.849 R1.1
  Top Layer w0.508: N1.1@-57.527,28.167 -50.315,20.955 -24.779,20.955 R1.1@-23.258,22.476
NetN2_1: N2.1 R2.1 | length 15.3
  Top Layer w0.508: N2.1 -38.1,28.943 -37.373,28.216 -37.256,28.216 -31.939,22.899 R2.1
NetN3_1: N3.1 R3.1 | length 44.9
  Top Layer w0.508: N3.1 -10.16,28.943 -9.433,28.216 -9.316,28.216 -6.881,25.781 21.59,25.781 29.083,18.288 R3.1
NetN4_1: N4.1 R4.1 | length 26.5
  Top Layer w0.508: N4.1 10.16,28.943 10.887,28.216 11.004,28.216 12.208,27.012 21.806,27.012 31.623,17.195 R4.1
NetN5_1: N5.1 R5.1 | length 13.5
  Top Layer w0.508: R5.1 34.163,17.195 38.1,21.132 N5.1
NetN6_1: N6.1 R6.1 | length 26.8
  Top Layer w0.508: R6.1 36.703,17.156 44.693,25.146 54.506,25.146 57.576,28.216 57.693,28.216 58.42,28.943 N6.1
NetR8_1: R8.1 USB1.4 | length 8.8
  Top Layer w0.254: USB1.4 -59.621,10.676 -58.978,10.033 R8.1
NetR9_1: R9.1 USB1.3 | length 8.8
  Top Layer w0.254: USB1.3 -59.494,11.676 -58.978,12.192 R9.1
NetR13_1: R13.1 U3.2 U3.4 U3.6 U3.8 | length 19
  Top Layer w0.254: v1@-10.795,-25.273 U3.2 ; v1@-8.255,-25.273 U3.4 ; v1(-5.715,-25.4) U3.6@-5.715,-23.241 ; v1(-3.175,-25.4) U3.8@-3.175,-23.368
  Bottom Layer w0.254: v1(-10.795,-25.4) v1(-8.255,-25.4) v1(-5.715,-25.4) v1(-3.175,-25.4) -3.078,-25.497 -3.078,-25.779 -1.397,-27.46 R13.1
NetR18_1: R18.1 U4.2 U4.4 U4.6 U4.8 | length 20.6
  Top Layer w0.254: 4.445,-25.019 U4.2@4.445,-22.86 ; v1@6.985,-25.273 U4.4 ; v1@9.525,-25.273 U4.6 ; v1@12.065,-25.273 U4.8
  Bottom Layer w0.254: R18.1 1.516,-27.137 1.516,-26.805 2.921,-25.4 v1(4.445,-25.4) v1(6.985,-25.4) v1(9.525,-25.4) v1(12.065,-25.4)
RP_Boost: P1.15 U4.7 | length 49.5
  Top Layer w0.254: P1.15 -19.19,-36.716 4.61,-36.716 10.795,-30.531 U4.7
RP_CLK: P1.12 U4.3 | length 115.3
  Top Layer w0.254: v1(-47.752,-33.655) v1(-42.926,-33.655) ; v1(-17.78,-33.528) v1(-15.494,-33.528) ; v1(5.588,-27.305) 5.588,-23.241 U4.3
  Bottom Layer w0.254: v1(-47.752,-33.655) -52.197,-38.1 -52.197,-47.498 -50.292,-49.403 -33.02,-49.403 -30.988,-47.371 P1.12 ; v1(-42.926,-33.655) -42.862,-33.591 -17.843,-33.591 v1(-17.78,-33.528) ; v1(-15.494,-33.528) -13.081,-35.941 10.668,-35.941 11.811,-34.798 11.811,-33.528 v1(5.588,-27.305)
RP_DIN1: P1.7 U3.1 | length 39.2
  Top Layer w0.254: P1.7 -36.195,-43.307 -36.195,-40.64 -30.734,-35.179 -15.582,-35.179 -12.065,-31.662 U3.1
RP_DIN2: P1.32 U3.3 | length 74.4
  Top Layer w0.254: v1(-9.525,-30.861) U3.3 ; v1(-6.096,-34.29) 5.461,-34.29 7.366,-32.385 v1(7.366,-27.305) ; P1.32 -3.175,-48.387 11.176,-48.387 13.589,-45.974 v1(13.589,-35.306)
  Bottom Layer w0.254: v1(-9.525,-30.861) v1(-6.096,-34.29) ; v1(7.366,-27.305) 13.589,-33.528 v1(13.589,-35.306)
RP_DIN3: P1.8 U3.5 | length 76.9
  Top Layer w0.254: v1(-6.985,-26.289) U3.5
  Bottom Layer w0.254: P1.8 -38.608,-48.514 -49.403,-48.514 -51.33,-46.587 -51.33,-40.027 -39.318,-28.015 cw(c-39.138,-28.194) -39.138,-27.94 -8.636,-27.94 v1(-6.985,-26.289)
RP_DIN4: P1.11 U3.7 | length 39.7
  Top Layer w0.254: P1.11 -23.241,-35.687 -8.89,-35.687 -4.445,-31.242 U3.7
RP_LE: P1.33 U4.1 | length 31.3
  Top Layer w0.254: P1.33 1.143,-39.243 5.588,-39.243 v1(10.16,-34.671) ; v1@3.175,-27.495 U4.1
  Bottom Layer w0.254: v1@3.175,-27.495 3.175,-27.686 v1(10.16,-34.671)
  other v1: 3.175,-27.305
RP_POL: P1.13 U4.5 | length 50.5
  Top Layer w0.254: P1.13 -21.209,-36.195 4.43,-36.195 8.255,-32.37 U4.5
SPI_CE1: P1.26 P2.5 | length 72.9
  Top Layer w0.254: P1.26 -10.16,-49.022 19.685,-49.022 38.354,-30.353 38.354,-23.749 P2.5
SPI_MISO: P1.21 P2.3 | length 64.1
  Top Layer w0.254: P1.21 -18.288,-39.116 -16.891,-37.719 5.258,-37.719 9.944,-33.033 27.826,-33.033 v1(27.94,-33.147)
  Bottom Layer w0.254: v1(27.94,-33.147) 27.94,-31.115 P2.3
SPI_MOSI: P1.19 P2.2 | length 64
  Top Layer w0.254: P1.19 -20.828,-39.624 -18.415,-37.211 4.953,-37.211 10.084,-32.08 29.515,-32.08 P2.2
SPI_SCLK: P1.23 P2.4 | length 63.1
  Top Layer w0.254: P1.23 -15.748,-39.548 -14.414,-38.214 5.474,-38.214 9.906,-33.782 v1(26.162,-33.782)
  Bottom Layer w0.254: v1(26.162,-33.782) 26.162,-30.353 P2.4
V3.3: C2.1 C4.2 P1.1 P1.17 R10.2 R11.2 R12.2 R13.2 R18.2 U2.2 U5.5 | length 159.6
  Top Layer w0.254: P1.1@-43.815,-43.307 P1.1 ; R12.2 -36.576,-38.862 v2(-36.576,-37.211) ; U2.2 -21.322,-32.385 -20.204,-31.267 v1(-20.204,-34.43) ; R11.2 -18.429,-29.337 v2(-16.637,-29.337) ; v1(7.493,-41.275) 7.493,-38.735 v1(8.89,-37.338) ; C4.2 v2(24.511,-36.322) ; U5.5 24.499,-40.501 v2(24.511,-40.513)
  Bottom Layer w0.254: P1.1 -43.776,-43.346 v1(-43.776,-37.25) -36.576,-37.25 -20.193,-37.25 ; P1.17 -21.209,-41.275 v1(7.493,-41.275) ; v1(-20.204,-34.43) -20.193,-34.441 -20.193,-37.25 ; R18.2 R13.2 -1.524,-29.337 v2(-16.637,-29.337) -16.637,-37.25 ; v2(24.511,-40.513) 24.511,-37.719 ; v2(24.511,-36.322) 24.511,-37.719 ; -20.193,-37.25 -16.637,-37.25 ; -16.637,-37.25 8.89,-37.25 R10.2 14.517,-37.25 14.986,-37.719 24.511,-37.719
V5: C1.2 P1.2 P1.4 P2.1 R14.2 R15.2 R16.2 R17.2 R19.2 R20.2 R21.2 R22.2 S1.4 U1.31 U1.32 U1.33 USB1.2 USB1.5 | length 267.2
  Top Layer w0.254: USB1.5 -62.615,9.656 -61.468,8.509 ; USB1.2 -62.584,12.696 -61.31,13.97 ; -41.021,13.97 -40.999,13.992 ; -1.397,-10.756 -1.209,-10.568 U1.31@-1.209,-3.598 ; C1.2 -0.432,-10.656 U1.32@-0.432,-3.589 ; 0.381,-10.756 0.381,-5.598 0.391,-5.588 ; 0.391,-5.573 U1.33@0.391,-3.471
  Top Layer w0.508: -61.468,8.509 -55.626,8.509 -52.197,5.08 -52.197,-47.498 -50.546,-49.149 -46.863,-49.149 P1.2 P1.4 ; -61.31,13.97 -41.021,13.97 ; -40.999,13.992 -16.251,-10.756 -1.397,-10.756 0.381,-10.756 R22.2 34.461,-10.756 39.766,-16.06 39.766,-31.138 S1.4 ; v2(31.369,-32.766) P2.1
  Bottom Layer w0.508: v2(31.369,-32.766) 35.227,-36.624 S1.4
V170: B.4 R1.2 R2.2 R3.2 R4.2 R5.2 R6.2 R7.2 | length 81.6
  Top Layer w0.254: R3.2 R3.2@29.21,15.445
  Top Layer w0.508: R2.2 R1.2 -22.796,24.638 21.209,24.638 26.543,19.304 26.543,16.891 27.989,15.445 R3.2 29.083,15.395 26.543,12.855 R7.2 ; R3.2@29.21,15.445 29.288,15.367 31.623,15.367 34.163,15.367 36.703,15.367 B.4
pads on no net: BT1.0 M1.1 M1.5 M1.6 N1.2 N1.13 N2.2 N2.13 N3.2 N3.13 N4.2 N4.13 N5.2 N5.13 N6.2 N6.13 P1.10 P1.16 P1.18 P1.22 P1.24 P1.27 P1.28 P1.29 P1.31 P1.35 P1.36 P1.37 P1.38 P1.40 S1.1 S1.2 S1.3 S1.6 U1.36 U1.37 U1.38 U1.39 U1.41 U1.42 U1.43 U1.44 U2.1 U2.4 U5.3 U5.6
copper on no net: | length 15.8
  Top Layer w0.254: 8.047,-0.94 v1(12.781,-0.94) ; 8.047,-0.14 v1(11.219,-0.14) ; 8.047,0.66 v1(12.781,0.66) ; 8.047,1.46 v1(11.219,1.46)

## Polygon pours and split planes (outlines as drawn)
no net on Top Layer "NONET_L01_P004" (solid, pour order 4): 16.129,13.843
no net on Top Layer "NONET_L01_P002" (solid, pour order 2): 32.258,24.511
no net on Top Layer "NONET_L01_P001" (solid, pour order 1): 55.372,21.209
GND on Bottom Layer "GND_L02_P015" (hatched 45Degree grid 0.508 track 0.203, pour order 15): 33.909,-1.016
DGND on Bottom Layer "DGND_L02_P012" (hatched Horizontal grid 0.508 track 0.203, pour order 12): 34.29,48.895
DGND on Bottom Layer "DGND_L02_P011" (hatched Horizontal grid 0.508 track 0.203, pour order 11): 34.544,48.895

## Keep-outs
Keep-Out Layer:
  lines w0.254: -74.322,41.883 -74.322,-50.293 ccw(c-71.895,-50.278) -71.907,-52.705 71.12,-52.705 ; -74.295,41.91 cw(c-70.962,41.91) -70.995,45.243 ; -70.964,45.212 71.12,45.212 ; 71.247,45.212 cw(c71.247,41.879) 74.58,41.879 ; 71.248,-52.705 ccw(c71.222,-49.372) 74.551,-49.225 ; 74.549,-49.292 74.549,41.783

## Other copper
Bottom Layer:
  pour cut-out: 64.389,-2.286

## Text inside footprints (layer, text, board x,y; h text height)
P1: Bottom Overlay "39" at 8.128,-42.799 h1.02; Bottom Overlay "40" at 8.001,-47.498 h1.02; Bottom Overlay "2" at -45.593,-46.736 h1.02; Bottom Overlay "1" at -45.593,-43.688 h1.02